# EAGLE board OSMC_JD (EAGLE 5.10)
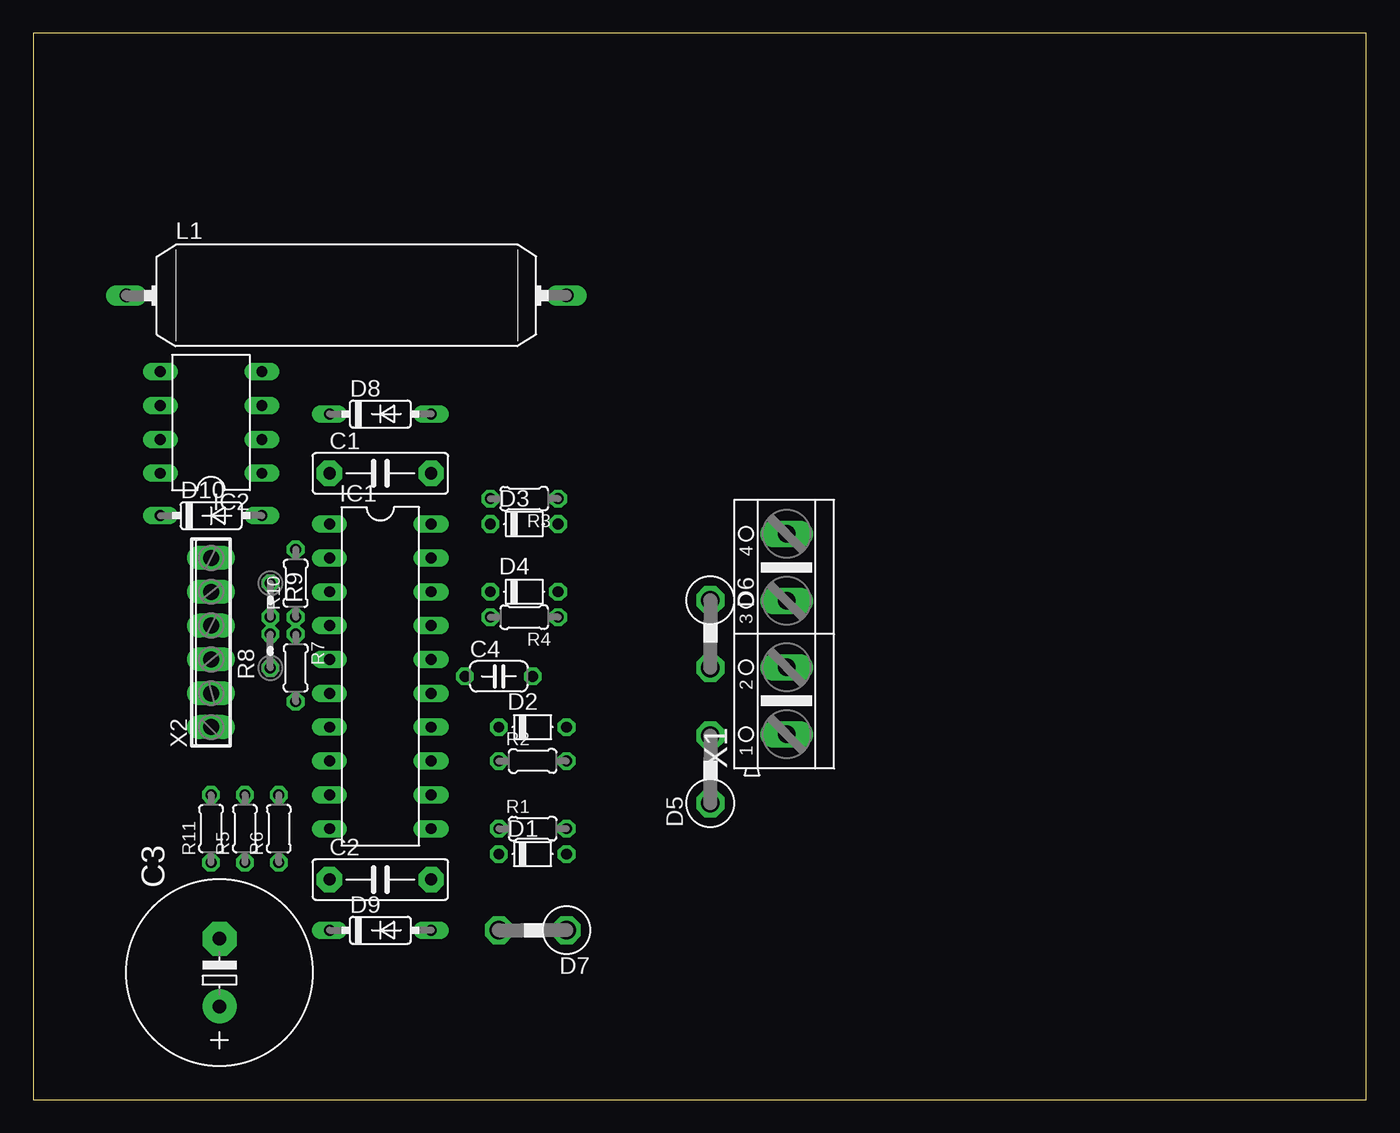
[diagram p0: board, top side]
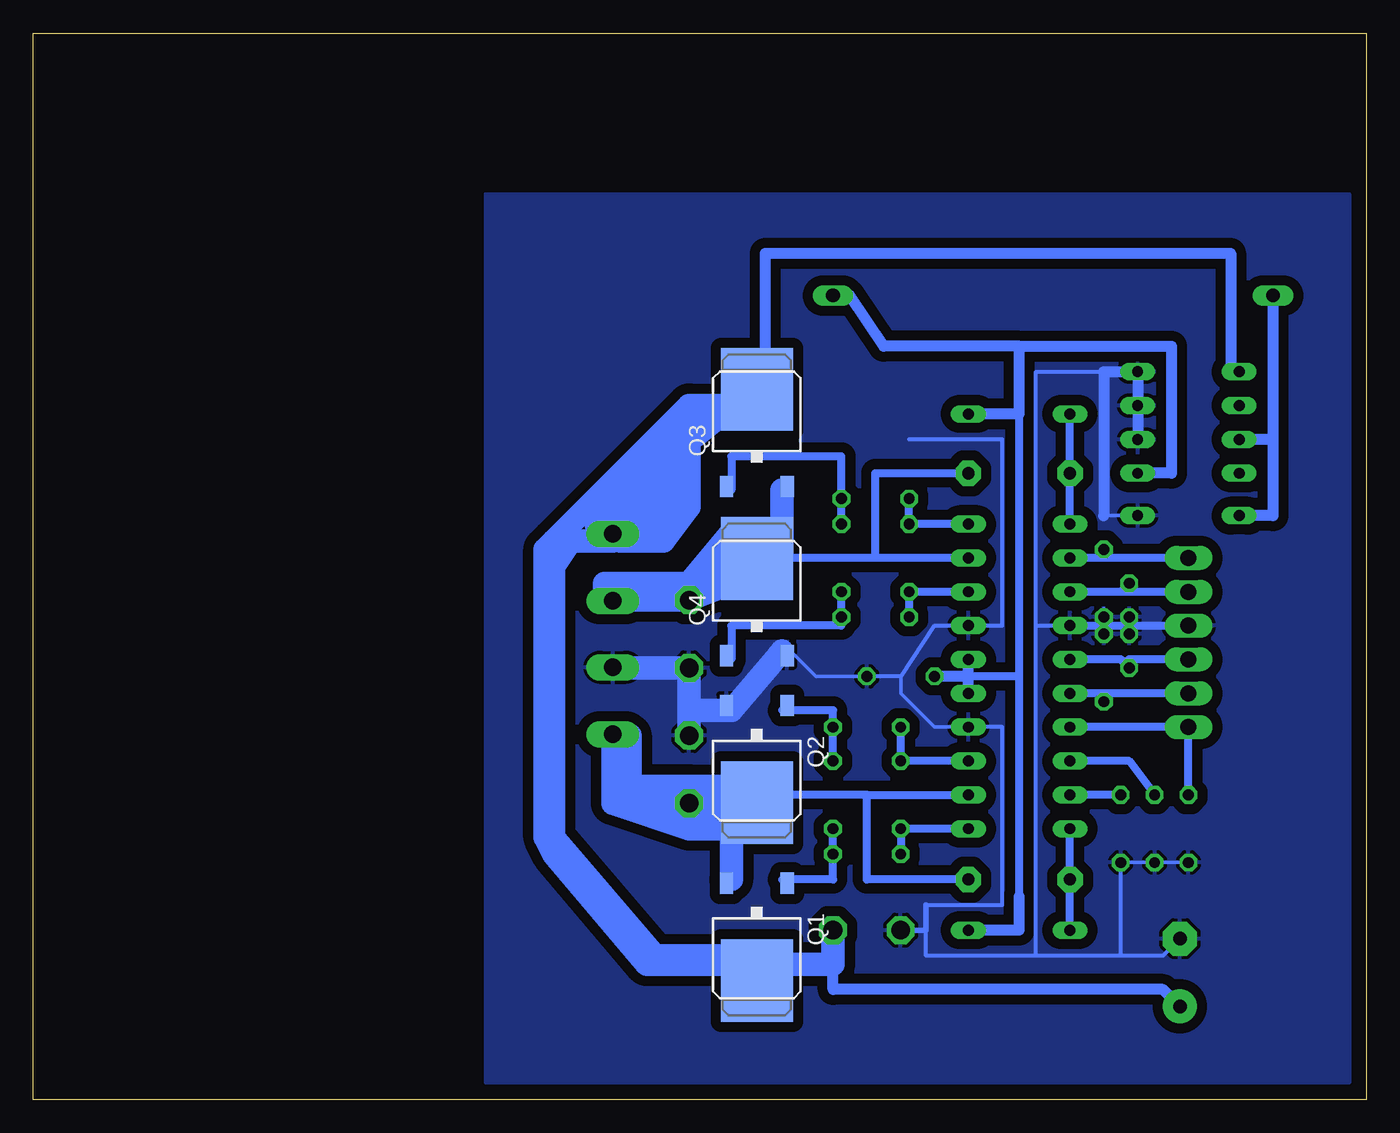
[diagram p1: board, bottom side, seen from below]

Size 100 x 80 mm. Coordinates in mm from the lower left corner, seen from the top.
Outline: 0,0 100,0 100,80 0,80 0,0
Copper layers (1*16): Top 0.035mm / dielectric 1.5mm / Bottom 0.035mm
Design rules "default *": minimum track width 10mil, minimum drill 24mil, track to track 30mil, track to pad 30mil, pad to pad 8mil, via to via 8mil, smd to smd 8mil, copper to edge 40mil, drill to drill 8mil, minimum pad ring 10mil, minimum via ring 8mil, stop-mask expansion 4mil, vias tented up to drill 0mil, thermal gap 10mil

## Footprints (pad centres in the part's own frame; a part is rotated, then mirrored left to right if it is on the bottom)
C7.5B3 = drill 0.914 pad 1.905 octagon: 1 -3.81,0; 2 3.81,0
E5-13 = drill 1.016 pad 2.54 round: + -2.54,0 | drill 1.016 pad 2.54 octagon: - 2.54,0
C050-024X044 = drill 0.813 octagon: 1 -2.54,0; 2 2.54,0
D-5 = drill 0.813 octagon: A 2.54,0; C -2.54,0
C1702-05 = drill 1.397 octagon: A 2.54,0; C -2.54,0
DO35-7 = drill 0.813 long: A 3.81,0; C -3.81,0
DIL20 = drill 0.813 long: 1 -11.43,-3.81; 2 -8.89,-3.81; 3 -6.35,-3.81; 4 -3.81,-3.81; 5 -1.27,-3.81; 6 1.27,-3.81; 7 3.81,-3.81; 8 6.35,-3.81; 9 8.89,-3.81; 10 11.43,-3.81; 11 11.43,3.81; 12 8.89,3.81; 13 6.35,3.81; 14 3.81,3.81; 15 1.27,3.81; 16 -1.27,3.81; 17 -3.81,3.81; 18 -6.35,3.81; 19 -8.89,3.81; 20 -11.43,3.81
DIL08 = drill 0.813 long: 1 -3.81,-3.81; 2 -1.27,-3.81; 3 1.27,-3.81; 4 3.81,-3.81; 5 3.81,3.81; 6 1.27,3.81; 7 -1.27,3.81; 8 -3.81,3.81
SUKW4-32 = drill 1.016 long: 1 -16.51,0; 2 16.51,0
D-PAK_TO252AA = smd 1 x 1.6: 1 -2.28,-4.8; 3 2.28,-4.8 | smd 5.4 x 6.2: 4 0,2.5
0204/5 = drill 0.813 octagon: 1 -2.54,0; 2 2.54,0
0204V = drill 0.813 octagon: 1 -1.27,0; 2 1.27,0
AK500/4 = drill 1.321 long: 1 -7.518,0; 2 -2.489,0; 3 2.489,0; 4 7.518,0
6POL254 = drill 1.2 pad 1.778 long: 1 -6.35,0; 2 -3.81,0; 3 -1.27,0; 4 1.27,0; 5 3.81,0; 6 6.35,0

## Placement (x,y rotation side)
C1  [C7.5B3]  26.04,46.99 0 top
C2  [C7.5B3]  26.04,16.51 0 top
C3  [E5-13]  13.97,9.53 90 top
C4  [C050-024X044]  34.92,31.75 0 top
D1  [D-5]  37.47,18.41 0 top
D2  [D-5]  37.47,27.94 0 top
D3  [D-5]  36.83,43.18 0 top
D4  [D-5]  36.83,38.1 0 top
D5  [C1702-05]  50.8,24.77 90 top
D6  [C1702-05]  50.8,34.92 270 top
D7  [C1702-05]  37.47,12.7 180 top
D8  [DO35-7]  26.04,51.44 0 top
D9  [DO35-7]  26.04,12.7 0 top
D10  1N4004  [DO35-7]  13.34,43.81 0 top
IC1  [DIL20]  26.04,31.75 270 top
IC2  LM2574HVN-12  [DIL08]  13.34,50.8 90 top
L1  B82134  [SUKW4-32]  23.5,60.33 0 top
Q1  IRF3704S  [D-PAK_TO252AA]  45.72,11.43 180 bottom
Q2  IRF3704S  [D-PAK_TO252AA]  45.72,24.77 180 bottom
Q3  IRF3704S  [D-PAK_TO252AA]  45.72,50.8 0 bottom
Q4  IRF3704S  [D-PAK_TO252AA]  45.72,38.1 0 bottom
R1  [0204/5]  37.47,20.32 0 top
R2  [0204/5]  37.47,25.4 0 top
R3  [0204/5]  36.83,45.09 180 top
R4  [0204/5]  36.83,36.2 180 top
R5  [0204/5]  15.88,20.32 90 top
R6  [0204/5]  18.41,20.32 90 top
R7  [0204/5]  19.68,32.38 270 top
R8  [0204V]  17.78,33.66 90 top
R9  [0204V]  17.78,37.47 270 top
R10  [0204/5]  19.68,38.73 90 top
R11  [0204/5]  13.34,20.32 90 top
X1  [AK500/4]  56.52,34.92 90 top
X2  [6POL254]  13.34,34.29 90 top

## Library data of the parts
C1 C2 = capacitor-wima
C3 C4 R1-R11 = rcl
D1-D10 = diode
IC1 = ic-package
IC2 = linear
L1 = inductors
Q1-Q4 = transistor-power
X1 = con-ptr500
X2 = con-phoenix-254

## Nets
+12V: C4.1 D8.A D9.A IC1.15 IC1.16 IC2.1 L1.2
AHI: IC1.7 R11.2 X2.1
AHO: D1.C IC1.11 R1.1
AHS: C2.2 D5.C IC1.12 Q1.3 Q2.4 X1.1
ALI: IC1.6 R7.2 X2.2
ALO: D2.C IC1.13 R2.1
BHI: IC1.2 R10.2 X2.6
BHO: D3.C IC1.20 R3.2
BHS: C1.2 D6.C IC1.19 Q3.3 Q4.4 X1.3
BLI: IC1.5 R8.1 X2.3
BLO: D4.C IC1.18 R4.2
DIS: IC1.3 R9.1 X2.5
GND: C3.- C4.2 D5.A D6.A D7.A D10.A IC1.4 IC1.14 IC1.17 IC2.2 IC2.3 IC2.4 Q2.3 Q4.3 R5.1 R6.1 R7.1 R8.2 R9.2 R10.1 R11.1 X1.2 X2.4
N$1: C2.1 D9.C IC1.10
N$2: C1.1 D8.C IC1.1
N$3: D10.C IC2.7 L1.1
N$5: D1.A Q1.1 R1.2
N$6: D2.A Q2.1 R2.2
N$7: D4.A Q4.1 R4.1
N$8: D3.A Q3.1 R3.1
N$14: IC1.8 R5.2
N$15: IC1.9 R6.2
V+: C3.+ D7.C IC2.5 Q1.4 Q3.4 X1.4

## Tracks (layer width: path | path; a pad name or v marks a point on that pad's centre or on a via)
+12V
  Bottom 0.254: 29.84,31.75 IC1.15 | 38.73,60.33 L1.2
  Bottom 0.61: 26.04,15.24 26.04,31.75 | 26.04,31.75 29.84,31.75 | 26.04,31.75 26.04,51.44
  Bottom 0.813: IC1.15 IC1.16 29.84,31.75 C4.1 | IC2.1 14.61,46.99 14.61,56.52 26.04,56.52 | 38.73,60.33 36.2,56.52 26.04,56.52 | D8.A 26.04,51.44 26.04,56.52 | D9.A 26.04,12.7 26.04,15.24
AHI
  Bottom 0.61: R11.2 X2.1 IC1.7
AHO
  Bottom 0.61: IC1.11 R1.1 D1.C
AHS
  Bottom 0.254: 47.62,21.59 46.35,21.59 Q2.4 45.09,22.86 | 47.62,16.51 Q1.3
  Bottom 0.61: 37.47,22.86 IC1.12 | 37.47,22.86 45.09,22.86 | 37.47,22.86 37.47,16.51 C2.2
  Bottom 1.778: 47.62,21.59 47.62,20.32 | 47.62,20.32 47.62,16.51 | 47.62,20.32 50.8,20.32 | 50.8,21.59 50.8,20.32 | 50.8,21.59 D5.C | D5.C 56.52,22.23 | 56.52,22.23 56.52,27.3 | 56.52,27.3 X1.1 | D5.C 47.62,22.23 47.62,21.59 | 47.62,21.59 50.8,21.59 | D5.C 50.8,23.5 | 50.8,23.5 48.26,23.5 | 50.8,23.5 55.88,23.5 56.52,22.23 | 50.8,20.32 56.52,22.23 | 56.52,27.3 55.24,27.3 55.24,24.13
ALI
  Bottom 0.254: IC1.6 19.68,30.48
  Bottom 0.61: 19.68,30.48 R7.2 | X2.2 IC1.6
ALO
  Bottom 0.61: IC1.13 R2.1 D2.C
BHI
  Bottom 0.61: 19.68,40.64 R10.2 | 19.68,40.64 IC1.2 | X2.6 19.68,40.64
BHO
  Bottom 0.61: IC1.20 D3.C R3.2
BHS
  Bottom 0.254: 43.81,40.64 45.09,39.37 Q4.4 46.35,40.64 46.18,40.35 | 43.81,45.72 Q3.3 | 56.52,37.47 X1.3
  Bottom 0.61: IC1.19 36.83,40.64 | 36.83,40.64 43.81,40.64 | 36.83,40.64 36.83,46.99 C1.2
  Bottom 1.778: 43.81,40.64 43.81,45.72 | 45.72,40.64 46.18,40.35 D6.C | D6.C 56.52,37.47 | D6.C 47.62,38.73
BLI
  Bottom 0.305: R8.1 17.78,33.02 18.41,33.02
  Bottom 0.61: IC1.5 18.41,33.02 R8.1 | X2.3 17.78,33.02
BLO
  Bottom 0.61: IC1.18 D4.C R4.2
DIS
  Bottom 0.305: IC1.3 18.41,38.1 | 17.78,38.1 R9.1
  Bottom 0.61: R9.1 18.41,38.1 | IC1.3 17.78,38.1 X2.5
GND
  Bottom 0.254: 34.92,31.75 34.92,30.48 32.38,27.94 IC1.14 | 36.83,31.75 C4.2 41.27,31.75 43.18,33.66 43.81,33.66 | 48.26,29.84 47.62,29.21 Q2.3 | R11.1 R5.1 R6.1 | IC1.4 19.68,35.56 R10.1 19.68,36.83 | 19.68,43.81 D10.A | Q4.3 43.81,33.02 44.13,33.29 | 56.52,32.38 X1.2
  Bottom 0.305: C4.2 34.92,31.75 32.38,35.56 IC1.17 27.3,35.56 27.3,49.53 34.29,49.53 | 19.68,54.61 24.77,54.61 24.77,35.56 | 24.77,35.56 IC1.4 | 24.77,10.79 24.77,35.56 | 18.41,10.79 24.77,10.79 | 18.41,10.79 R6.1 | IC1.14 27.3,27.94 27.3,14.61 33.02,14.61 | 33.02,12.7 33.02,10.79 24.77,10.79 | 18.41,10.79 15.24,10.79 C3.-
  Bottom 0.406: 33.02,14.61 33.02,12.7 D7.A
  Bottom 0.61: 19.68,35.56 R7.1 | IC1.4 X2.4
  Bottom 0.813: 19.68,43.81 19.68,54.61 IC2.4 IC2.3 IC2.2
  Bottom 1.778: 43.81,33.66 44.13,33.29 47.62,29.21 50.8,29.21 | 50.8,29.21 D5.A | 50.8,29.21 D6.A 56.52,32.38
  pour Bottom: 1.27,67.94 1.27,1.27 66.04,1.27 66.04,67.94
N$1
  Bottom 0.61: IC1.10 C2.1 D9.C
N$2
  Bottom 0.61: IC1.1 C1.1 D8.C
N$3
  Bottom 0.813: 6.99,49.53 6.99,43.81 D10.C | 6.99,49.53 IC2.7 | 6.99,49.53 L1.1
N$5
  Bottom 0.254: 43.81,16.51 Q1.1
  Bottom 0.61: 43.81,16.51 40.01,16.51 D1.A R1.2
N$6
  Bottom 0.254: 43.81,29.21 Q2.1 | R2.2 D2.A
  Bottom 0.61: R2.2 40.01,29.21 43.81,29.21
N$7
  Bottom 0.254: D4.A 39.37,35.56 | 47.62,33.02 Q4.1
  Bottom 0.61: 47.62,33.02 47.62,35.56 39.37,35.56 | R4.1 D4.A
N$8
  Bottom 0.254: 47.62,45.72 Q3.1
  Bottom 0.61: 47.62,45.72 47.62,48.26 39.37,48.26 R3.1 D3.A
N$10
  Bottom 1.778: 57.15,37.47 57.15,38.73 50.8,38.73 | 50.16,38.73 48.26,38.73 46.35,42.55 47.62,42.55 50.8,38.73 | 50.16,38.73 50.8,38.73 | 47.62,41.27 50.16,38.73
N$11
  Bottom 1.778: 48.26,51.44 51.44,48.9
N$14
  Bottom 0.61: R5.2 17.78,25.4 IC1.8
N$15
  Bottom 0.61: R6.2 IC1.9
V+
  Bottom 0.254: 45.09,53.34 45.09,54.61 Q3.4 46.35,53.34 | 46.35,10.16 Q1.4
  Bottom 0.305: 45.72,51.44 45.09,52.07 45.09,54.61 46.35,53.34 47.62,52.07
  Bottom 0.813: 45.09,54.61 45.09,63.5 10.16,63.5 10.16,54.61 IC2.5 | C3.+ 15.24,8.26 40.01,8.26 D7.C
  Bottom 1.778: 46.35,52.07 47.62,52.07 50.8,52.07 | 60.96,18.41 60.96,19.68 | 60.96,19.68 60.96,40.01 | 60.96,40.01 60.96,41.91 | 60.96,41.91 59.69,41.91 | 59.69,41.91 56.52,41.91 X1.4 55.98,41.91 52.7,41.91 50.8,44.45 50.8,50.8 | 45.72,10.16 46.35,10.16 53.98,10.16 60.96,18.41 | 45.72,10.16 Q1.4 45.72,8.89 | D7.C 40.01,10.16 45.72,10.16 | 50.8,52.07 50.8,50.8 | 50.8,52.07 52.07,46.99 52.07,43.18 55.24,43.18 | 55.24,43.18 56.52,43.18 50.8,52.07 | 55.24,43.18 52.7,46.35 52.7,44.45 | 50.8,50.8 45.09,51.44 | 46.99,10.79 53.34,10.79 60.96,19.68 | 60.96,41.91 50.8,52.07 | 50.8,52.07 57.78,43.18 56.52,42.55 | 60.96,41.91 61.59,41.27 61.59,19.68 60.96,18.41 | 60.96,40.01 59.69,41.91